# Altium PCB MGNGSQ4_Loopback.PcbDoc
Units mil, origin at the board's own origin, x right, y up, seen from the top; angles counter-clockwise.
Board outline 2280.03 x 2747.03 mil, 4 copper layers (Top Layer, Internal Plane 1, Internal Plane 2, Bottom Layer), stack 30.634 mil thick; 22 components, 71 nets, 146 pads, 0 vias.
Unrouted connection lines stored in the file: 2.
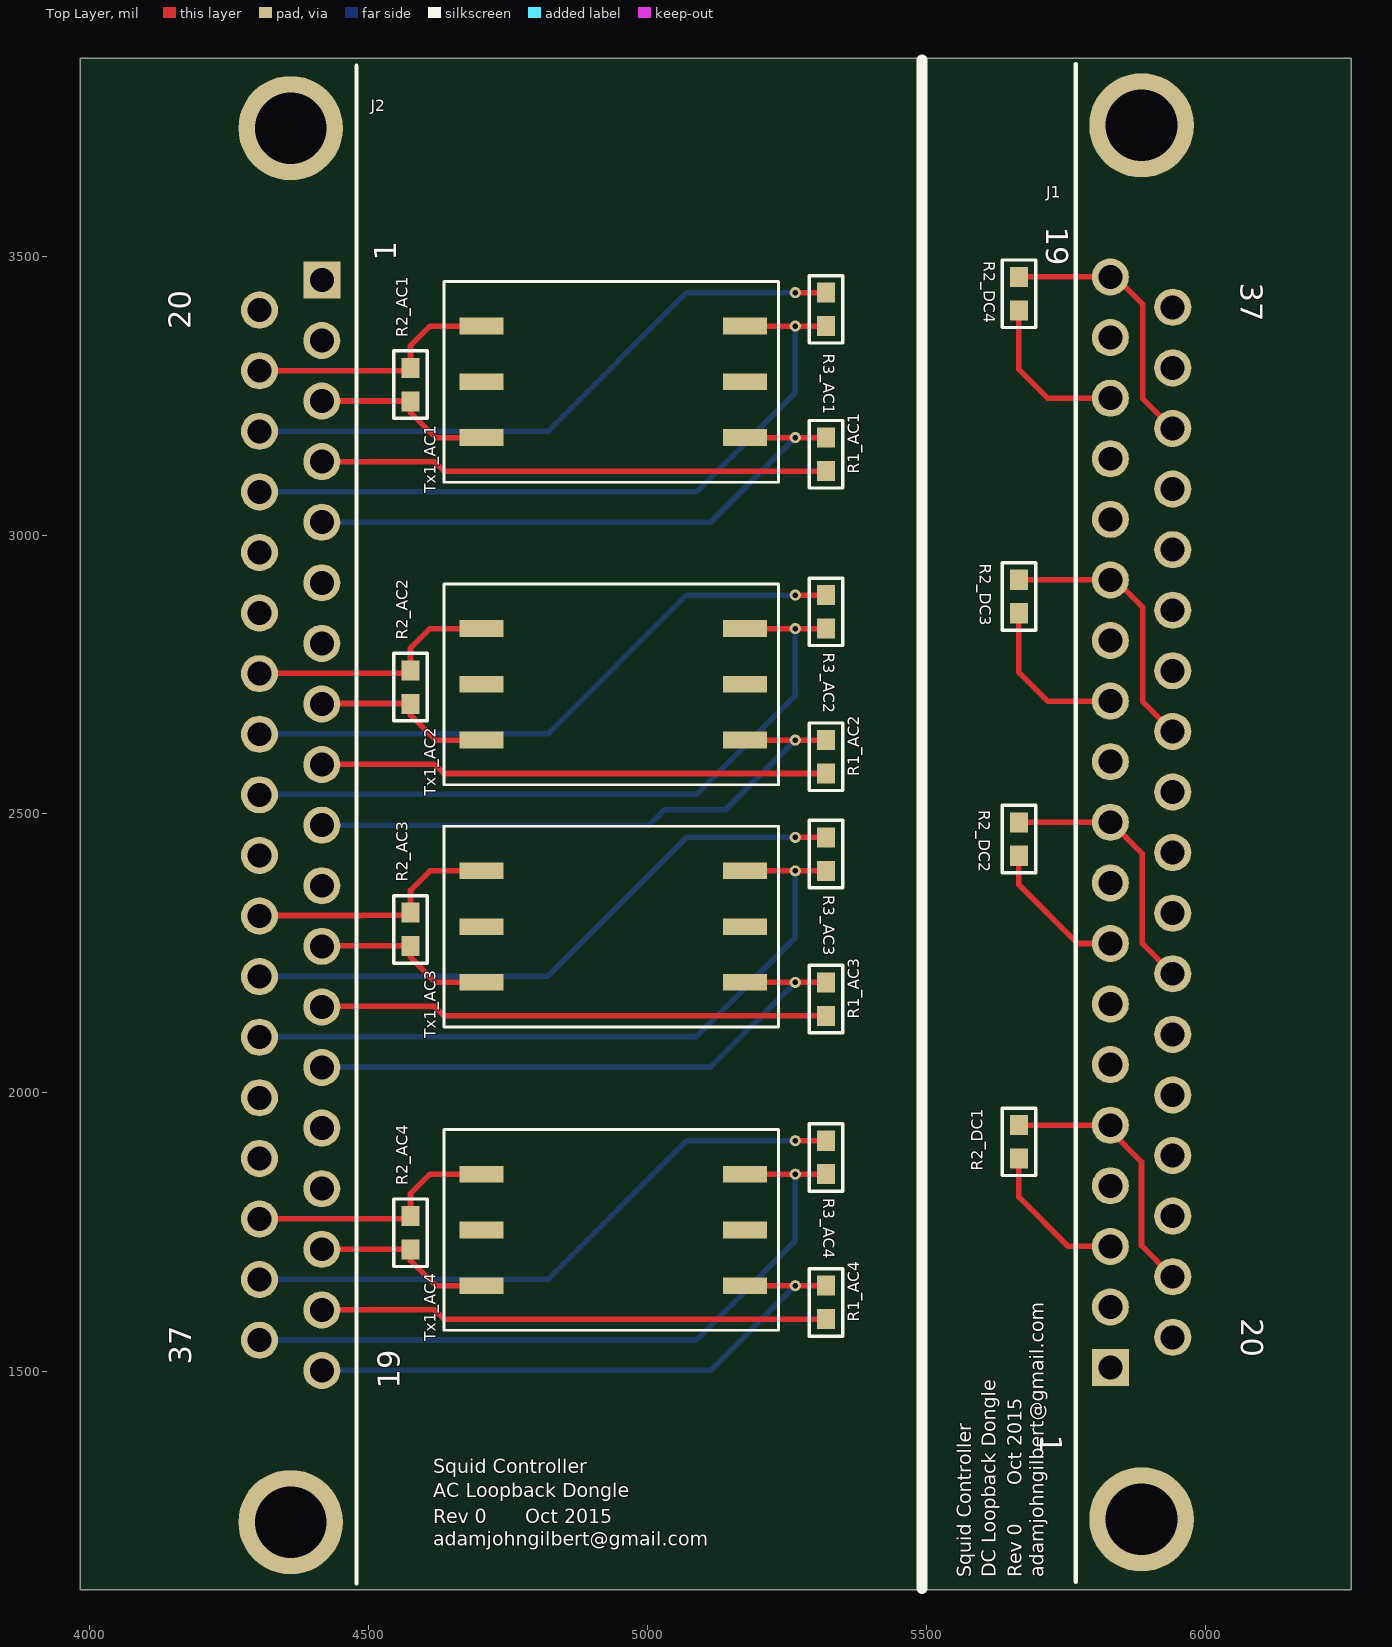
[diagram p0: Top Layer view]
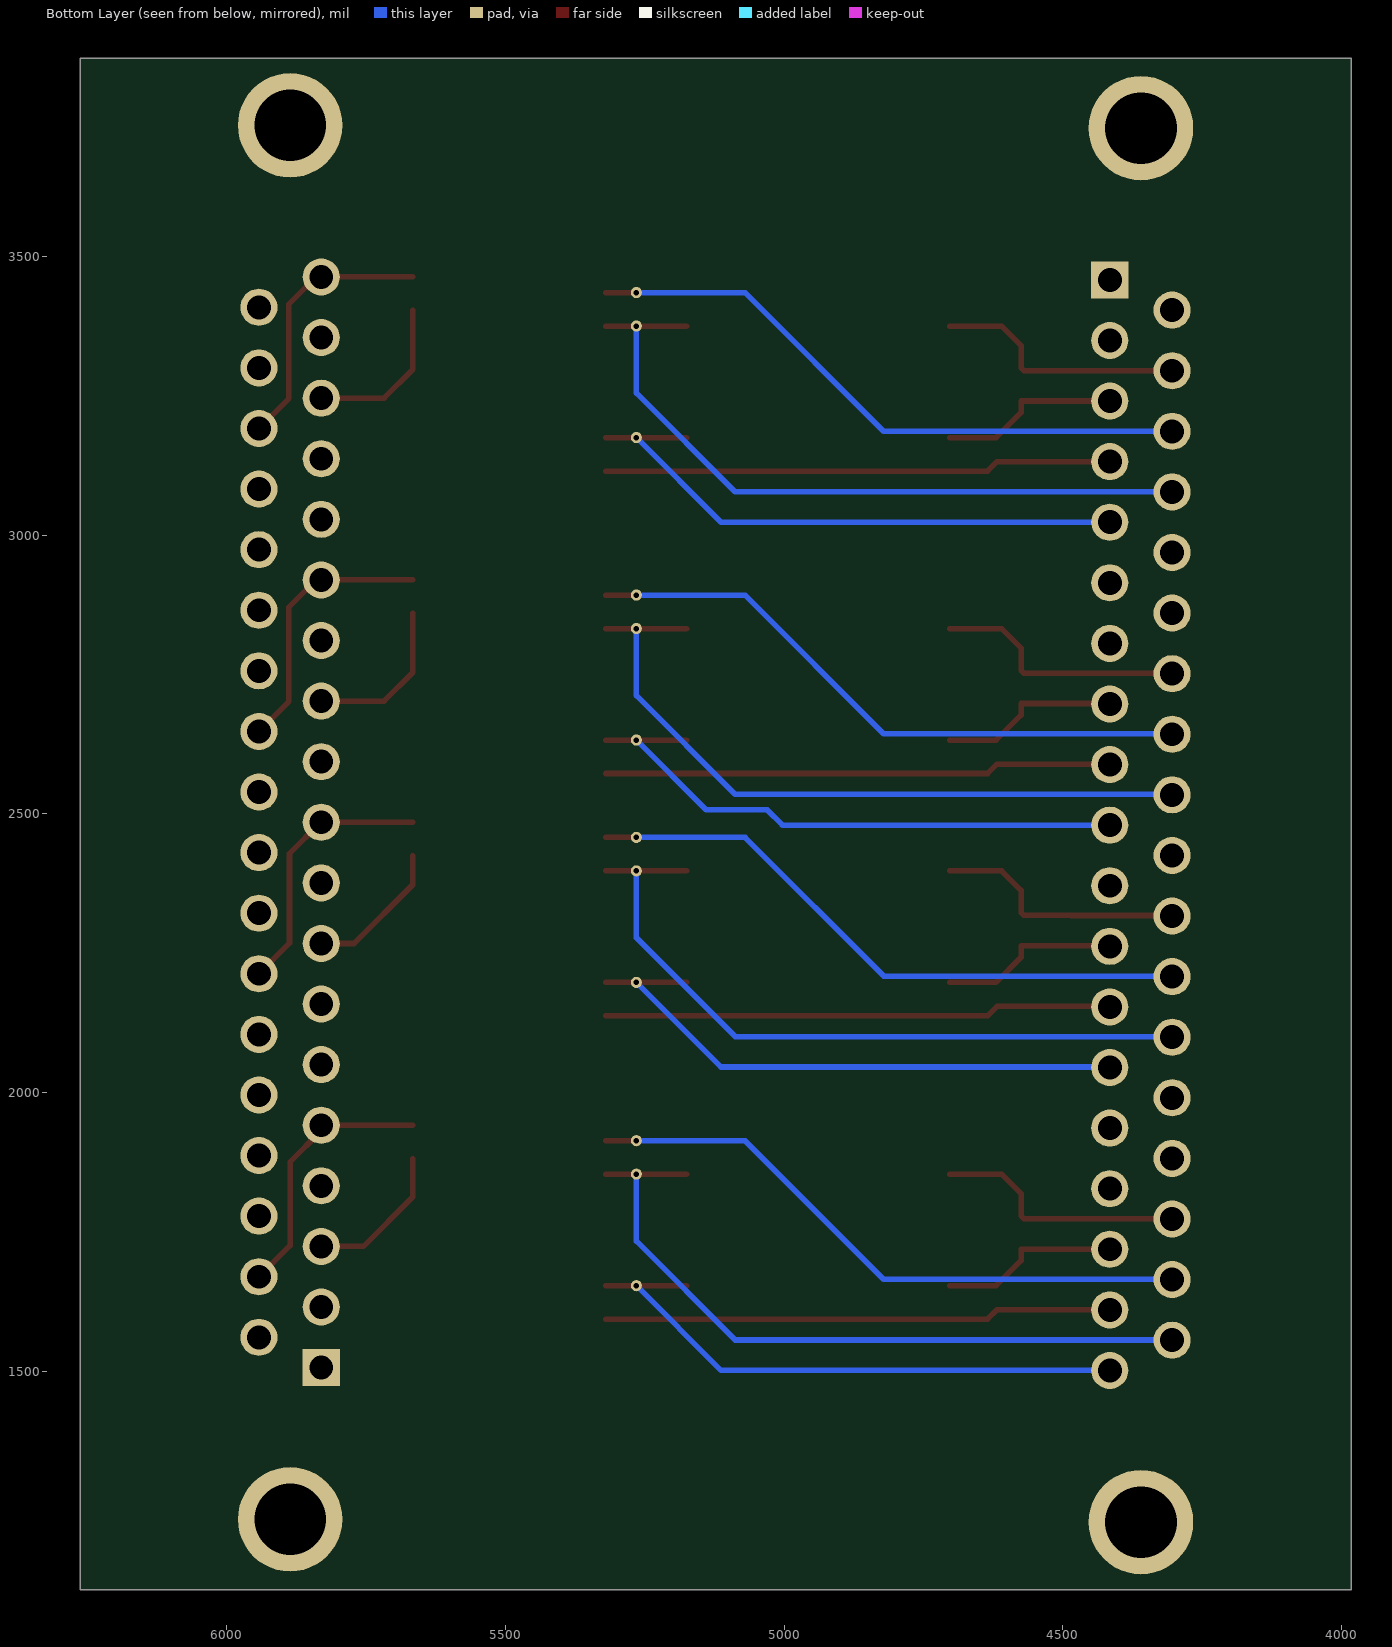
[diagram p1: Bottom Layer view, seen from below]
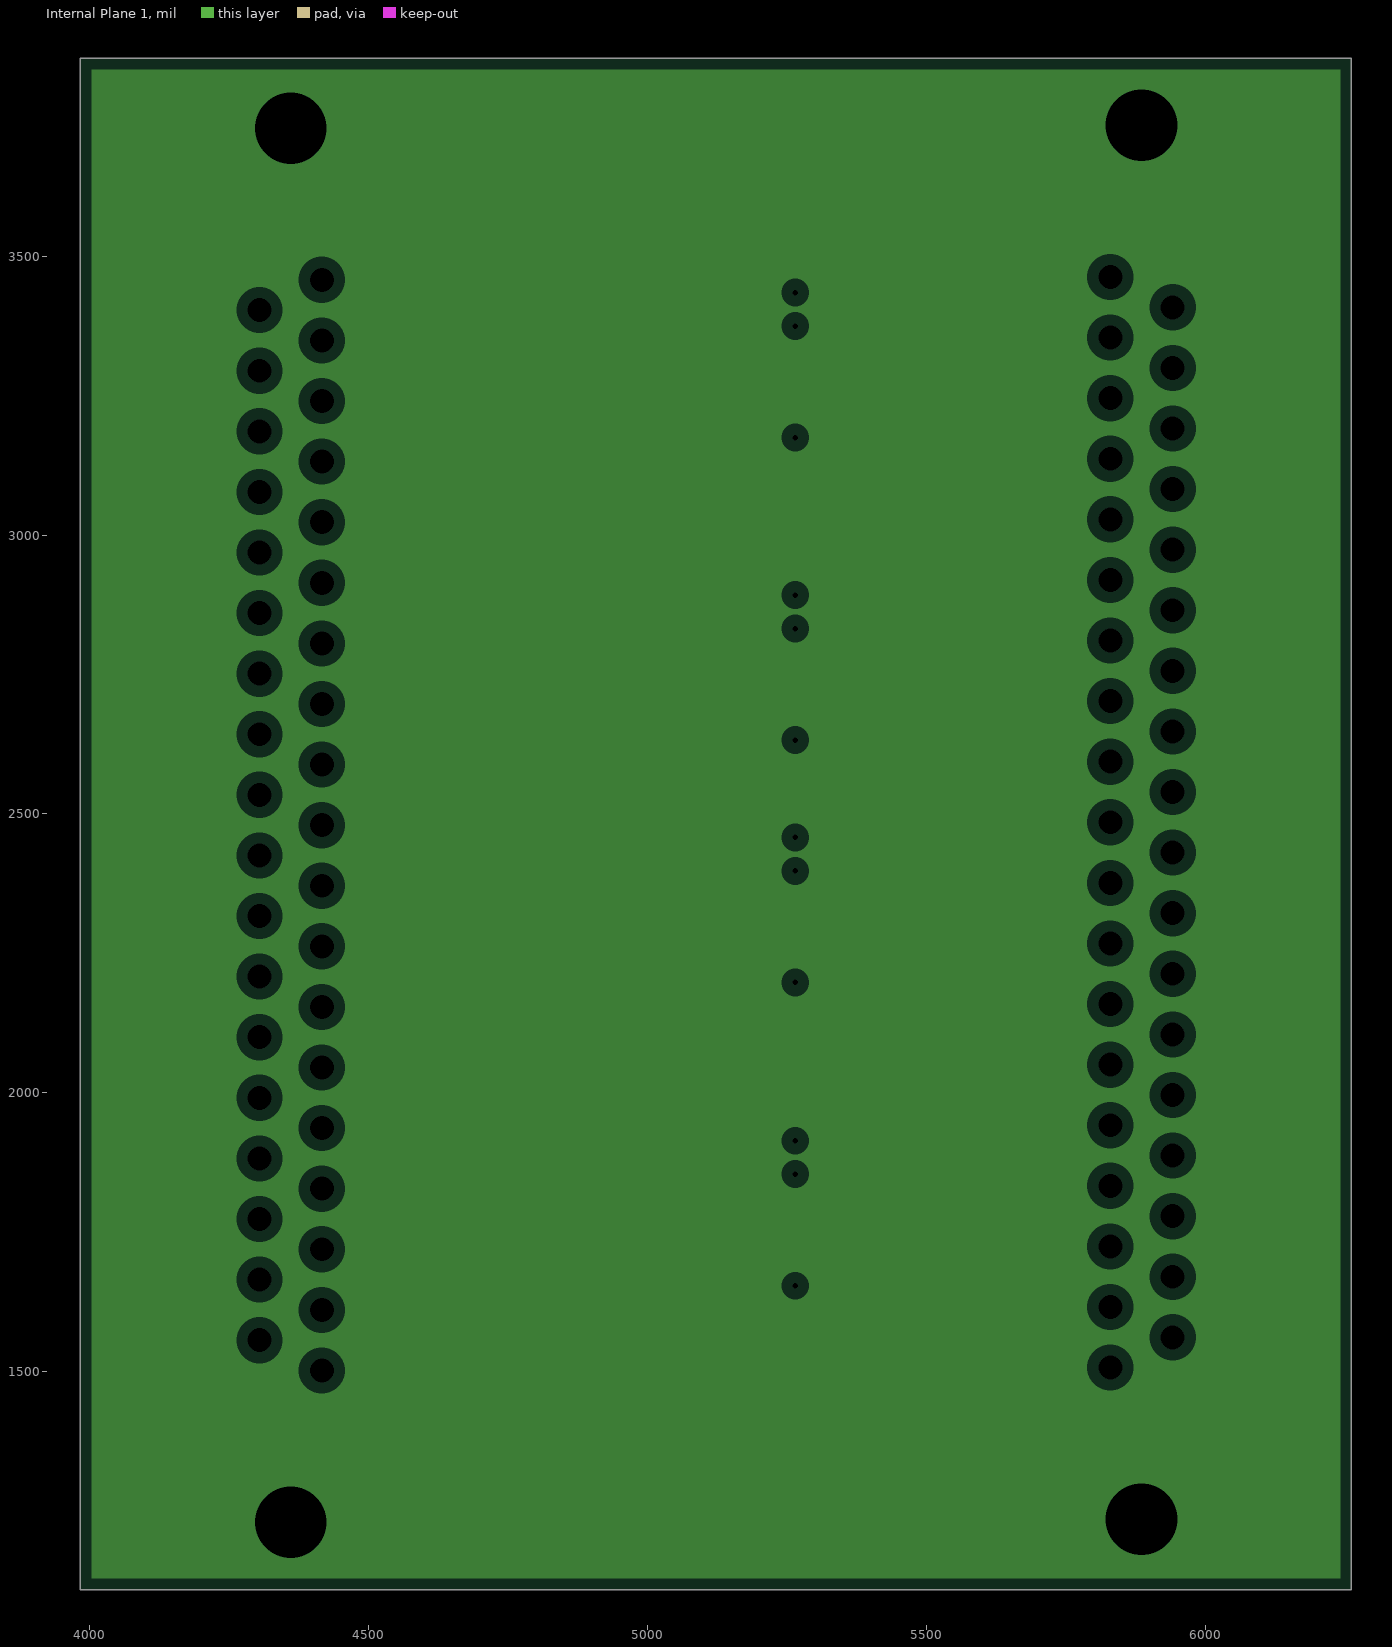
[diagram p2: Internal Plane 1, clearances drawn from the general rule]
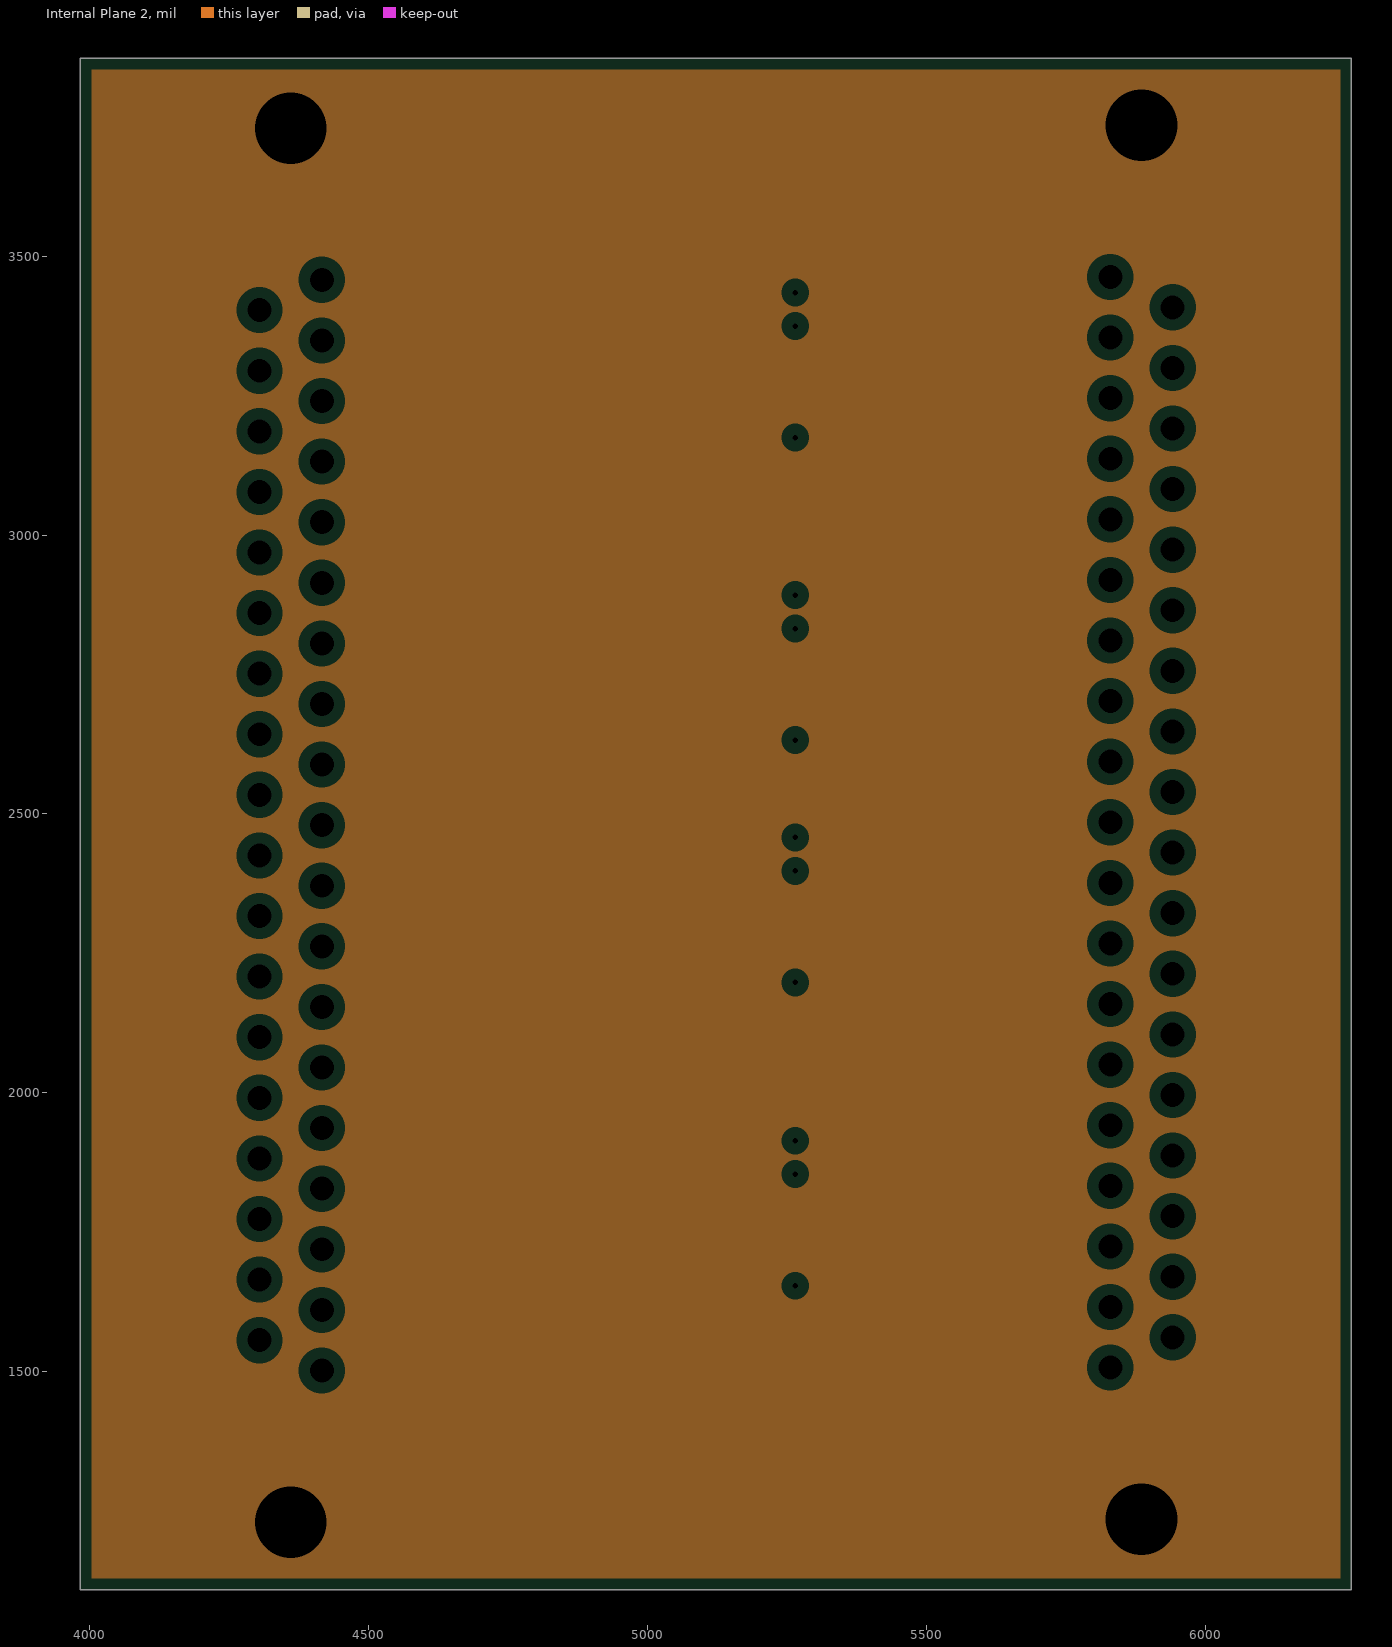
[diagram p3: Internal Plane 2, clearances drawn from the general rule]

## Layer stack, top to bottom
Top Solder: solder mask 0.4, Solder Resist, Dk 3.5
Top Layer: signal copper 1.4
Dielectric 1: core 10, FR-4, Dk 4.2
Internal Plane 1: plane copper 1.417, net GND
Dielectric 3: prepreg 5, Dk 4.2
Internal Plane 2: plane copper 1.417, net GND
Dielectric 2: core 10, Dk 4.2
Bottom Layer: signal copper 1.4
Bottom Solder: solder mask 0.4, Solder Resist, Dk 3.5

## Board outline
3982.49,1111 ccw(c3985,1111) 3985,1108.48 6260,1108.48 ccw(c6260,1111) 6262.52,1111 6262.52,3853 ccw(c6260,3853) 6260,3855.51 3985,3855.51 ccw(c3985,3853) 3982.49,3853

## Design rules (kind name [scope] priority, off if disabled: settings)
Clearance [All] p1: gap=10
PlaneClearance [All] p1: clearance=20
PlaneConnect [All] p1: planeconnectstyle=Relief reliefexpansion=20 reliefentries=4 reliefconductorwidth=10 reliefairgap=10
PolygonConnect [All] p1: connectstyle=Relief reliefconductorwidth=10 reliefentries=4 polygonreliefangle="90 Angle" airgapwidth=10
RoomDefinition AC4 [InComponentClass('AC4')] p1: confinementstyle=ConfineIn formatcopy=TRUE lockcomponents=FALSE outline 0,0 2000,0 2000,1000 0,1000
RoomDefinition AC3 [InComponentClass('AC3')] p2: confinementstyle=ConfineIn formatcopy=TRUE lockcomponents=FALSE outline 0,0 2000,0 2000,1000 0,1000
RoomDefinition AC2 [InComponentClass('AC2')] p3: confinementstyle=ConfineIn formatcopy=TRUE lockcomponents=FALSE outline 0,0 2000,0 2000,1000 0,1000
RoomDefinition AC1 [InComponentClass('AC1')] p4: confinementstyle=ConfineIn formatcopy=TRUE lockcomponents=FALSE outline 0,0 2000,0 2000,1000 0,1000
RoomDefinition DC2 [InComponentClass('DC2')] p5: confinementstyle=ConfineIn formatcopy=TRUE lockcomponents=FALSE outline 4215,1474 5415,1474 5415,1959 4215,1959
RoomDefinition DC3 [InComponentClass('DC3')] p6: confinementstyle=ConfineIn formatcopy=TRUE lockcomponents=FALSE outline 4215,2018 5415,2018 5415,2503 4215,2503
RoutingVias [All] p1: holewidth=28 width=50 viastyle="Through Hole" minholewidth=28 minwidth=50 maxholewidth=28 maxwidth=50
SolderMaskExpansion [All] p1: expansion=4
Width [All] p1: maxlimit=10 minlimit=10 preferedwidth=10
28 further rules are at their usual default settings.

## Classes and differential pairs
channel class Resistor: DC1 DC2 DC3 DC4
component class DC4: R2_DC4
component class DC3: R2_DC3
component class DC2: R2_DC2
component class DC1: R2_DC1
channel class Transformer: C1 C2 C3 C4
component class MGNGSQ4_Loopback: J1 J2
component class AC4: R1_AC4 R2_AC4 R2_C4 R3_AC4 Tx1_AC4
component class AC3: R1_AC3 R2_AC3 R2_C3 R3_AC3 Tx1_AC3
component class AC2: R1_AC2 R1_C2 R2_AC2 R3_AC2 Tx1_AC2
component class AC1: R1_AC1 R1_C1 R2_AC1 R3_AC1 Tx1_AC1

## Components (designator, comment, footprint, x,y, rotation, side; value= is the part's Value field where it differs from the comment)
J1 "DB37M" DSUB37-M 5886,1235 r270 top
J2 "DB37M" DSUB37-M 4360,3730 r90 top
R1_AC1 "10k" 0603 5320,3115 r90 top (schematic designator R1)
R1_AC2 "10k" 0603 5320,2572.5 r90 top (schematic designator R1)
R1_AC3 "10k" 0603 5320,2138 r90 top (schematic designator R1)
R1_AC4 "10k" 0603 5320,1594 r90 top (schematic designator R1)
R2_AC1 "10k" 0603 4575,3240 r90 top (schematic designator R2)
R2_AC2 "10k" 0603 4575,2697.5 r90 top (schematic designator R2)
R2_AC3 "10k" 0603 4575,2263 r90 top (schematic designator R2)
R2_AC4 "10k" 0603 4575,1719 r90 top (schematic designator R2)
R2_DC1 "10k" 0603 5666,1882 r90 top (schematic designator R2)
R2_DC2 "10k" 0603 5666,2425 r90 top (schematic designator R2)
R2_DC3 "10k" 0603 5666,2860 r90 top (schematic designator R2)
R2_DC4 "10k" 0603 5666,3403 r90 top (schematic designator R2)
R3_AC1 "10k" 0603 5320,3435 r270 top (schematic designator R3)
R3_AC2 "10k" 0603 5320,2892.5 r270 top (schematic designator R3)
R3_AC3 "10k" 0603 5320,2458 r270 top (schematic designator R3)
R3_AC4 "10k" 0603 5320,1914 r270 top (schematic designator R3)
Tx1_AC1 "WB2010" WB2010 5175,3175 r180 top (schematic designator Tx1)
Tx1_AC2 "WB2010" WB2010 5175,2632.5 r180 top (schematic designator Tx1)
Tx1_AC3 "WB2010" WB2010 5175,2198 r180 top (schematic designator Tx1)
Tx1_AC4 "WB2010" WB2010 5175,1654 r180 top (schematic designator Tx1)

## Footprints (in the part's own frame and the unit in brackets; to place one, negate y for a bottom-side part, rotate by r counter-clockwise, add the part's x,y. Pads: shape width x height; smd on the part's side, far side on the other; paste and mask are expansions set on the pad)
0603 [mil]
  rect 36x32 smd: 1(0,0) 2(60,0)
  silkscreen extent -31,-30 90,30, body extent -15,-15 75,15, height 39
DSUB37-M [mm] "DSUB 37Pin Male"
  rect 1.69x1.69 hole 1.09: 1(-6.912,-1.42)
  round 1.69 hole 1.09: 2(-9.672,-1.42) 3(-12.432,-1.42) 4(-15.192,-1.42) 5(-17.952,-1.42) 6(-20.712,-1.42) 7(-23.472,-1.42) 8(-26.232,-1.42) 9(-28.992,-1.42) 10(-31.752,-1.42) 11(-34.512,-1.42) 12(-37.272,-1.42) 13(-40.032,-1.42) 14(-42.792,-1.42) 15(-45.552,-1.42) 16(-48.312,-1.42) 17(-51.072,-1.42) 18(-53.832,-1.42) 19(-56.592,-1.42) 20(-8.291,1.42) 21(-11.051,1.42) 22(-13.811,1.42) 23(-16.571,1.42) 24(-19.331,1.42) 25(-22.091,1.42) 26(-24.851,1.42) 27(-27.611,1.42) 28(-30.371,1.42) 29(-33.131,1.42) 30(-35.891,1.42) 31(-38.651,1.42) 32(-41.411,1.42) 33(-44.171,1.42) 34(-46.931,1.42) 35(-49.691,1.42) 36(-52.451,1.42) 37(-55.211,1.42)
  round 4.76 hole 3.26: 38(0,0) 39(-63.5,0)
  silkscreen extent -66.29,-3 2.84,-3
WB2010 [mm] "Transformer 1:1"
  rect 2x0.76 smd: 1(0,0) 2(0,-2.54) 3(0,-5.08) 4(12,-5.08) 5(12,-2.54) 6(12,0)
  silkscreen extent -1.52,-7.11 13.72,2.03

## Part data
R1_AC1 R1_AC2 R1_AC3 R1_AC4 R2_AC1 R2_AC2 R2_AC3 R2_AC4 R2_DC1 R2_DC2 R2_DC3 R2_DC4 R3_AC1 R3_AC2 R3_AC3 R3_AC4: library part "RES 0603", "Resistor"
Tx1_AC1 Tx1_AC2 Tx1_AC3 Tx1_AC4: "WB2010 1:1 Transformer"

## Free pads (board coordinates)
  round 20 hole 10: 0(5265,1654) 0(5265,1854) 0(5265,1914) 0(5265,2198) 0(5265,2398) 0(5265,2458) 0(5265,2632.5) 0(5265,2832.5) 0(5265,2892.5) 0(5265,3175) 0(5265,3375) 0(5265,3435)

## Nets (pads, with @x,y where several pads share a name; then routed paths per layer and width w, separated by ;. In a path a pad name is that pad's centre, name@x,y a point inside that pad or via, vN(x,y) a via of type N, cw(c..) or ccw(c..) an arc to the next point about the centre after c; other vN are vias at no path point)
CHANNEL.BOLO_AC1_N: J2.22 pad.0@5265,3435 R3_AC1.1 | length 1118.9
  Top Layer w10: pad.0@5265,3435 R3_AC1.1
  Bottom Layer w10: J2.22 4821.26,3186.26 5070,3435 pad.0@5265,3435
CHANNEL.BOLO_AC1_P: J2.4 R1_AC1.1 | length 911.1
  Top Layer w10: J2.4 4618.11,3131.89 4635,3115 R1_AC1.1
CHANNEL.BOLO_AC2_N: J2.27 pad.0@5265,2892.5 R3_AC2.1 | length 1118.9
  Top Layer w10: pad.0@5265,2892.5 R3_AC2.1
  Bottom Layer w10: J2.27@4304.1,2643.76 4821.26,2643.76 5070,2892.5 pad.0@5265,2892.5
CHANNEL.BOLO_AC2_P: J2.9 R1_AC2.1 | length 911.1
  Top Layer w10: J2.9@4415.91,2589.39 4618.11,2589.39 4635,2572.5 R1_AC2.1
CHANNEL.BOLO_AC3_N: J2.31 pad.0@5265,2458 R3_AC3.1 | length 1118.9
  Top Layer w10: pad.0@5265,2458 R3_AC3.1
  Bottom Layer w10: J2.31@4304.1,2209.26 4821.26,2209.26 5070,2458 pad.0@5265,2458
CHANNEL.BOLO_AC3_P: J2.13 R1_AC3.1 | length 911.1
  Top Layer w10: J2.13@4415.91,2154.89 4618.11,2154.89 4635,2138 R1_AC3.1
CHANNEL.BOLO_AC4_N: J2.36 pad.0@5265,1914 R3_AC4.1 | length 1118.9
  Top Layer w10: pad.0@5265,1914 R3_AC4.1
  Bottom Layer w10: J2.36@4304.1,1665.26 4821.26,1665.26 5070,1914 pad.0@5265,1914
CHANNEL.BOLO_AC4_P: J2.18 R1_AC4.1 | length 911.1
  Top Layer w10: J2.18@4415.91,1610.89 4618.11,1610.89 4635,1594 R1_AC4.1
CHANNEL.BOLO_DC1_N: J1.22
CHANNEL.BOLO_DC1_P: J1.4
CHANNEL.BOLO_DC2_N: J1.27
CHANNEL.BOLO_DC2_P: J1.9
CHANNEL.BOLO_DC3_N: J1.31
CHANNEL.BOLO_DC3_P: J1.13
CHANNEL.BOLO_DC4_N: J1.36
CHANNEL.BOLO_DC4_P: J1.18
CHANNEL.HEATER_AC1_N: J2.1
CHANNEL.HEATER_AC1_P: J2.24
CHANNEL.HEATER_AC2_P: J2.6
CHANNEL.HEATER_AC3_P: J2.33
CHANNEL.HEATER_AC4_P: J2.15
CHANNEL.HEATER_DC1_N: J1.1
CHANNEL.HEATER_DC1_P: J1.24
CHANNEL.HEATER_DC2_P: J1.6
CHANNEL.HEATER_DC3_P: J1.33
CHANNEL.HEATER_DC4_P: J1.15
CHANNEL.SQUID_BIAS_AC1_N: J2.20
CHANNEL.SQUID_BIAS_AC1_P: J2.2
CHANNEL.SQUID_BIAS_AC2_N: J2.25
CHANNEL.SQUID_BIAS_AC2_P: J2.7
CHANNEL.SQUID_BIAS_AC3_N: J2.29
CHANNEL.SQUID_BIAS_AC3_P: J2.11
CHANNEL.SQUID_BIAS_AC4_N: J2.34
CHANNEL.SQUID_BIAS_AC4_P: J2.16
CHANNEL.SQUID_BIAS_DC1_N: J1.20
CHANNEL.SQUID_BIAS_DC1_P: J1.2
CHANNEL.SQUID_BIAS_DC2_N: J1.25
CHANNEL.SQUID_BIAS_DC2_P: J1.7
CHANNEL.SQUID_BIAS_DC3_N: J1.29
CHANNEL.SQUID_BIAS_DC3_P: J1.11
CHANNEL.SQUID_BIAS_DC4_N: J1.34
CHANNEL.SQUID_BIAS_DC4_P: J1.16
CHANNEL.SQUID_COIL_AC1_N: J2.23 pad.0@5265,3375 R3_AC1.2 Tx1_AC1.3 | length 1299.4
  Top Layer w10: Tx1_AC1.3 5265,3375 R3_AC1.2
  Bottom Layer w10: J2.23 5087.6,3077.6 5265,3255 pad.0@5265,3375
CHANNEL.SQUID_COIL_AC1_P: J2.5 pad.0@5265,3175 R1_AC1.2 Tx1_AC1.1 | length 1057
  Top Layer w10: Tx1_AC1.1 5265,3175 R1_AC1.2
  Bottom Layer w10: J2.5 5113.23,3023.23 pad.0@5265,3175
CHANNEL.SQUID_COIL_AC2_N: J2.28 pad.0@5265,2832.5 R3_AC2.2 Tx1_AC2.3 | length 1299.4
  Top Layer w10: Tx1_AC2.3 5265,2832.5 R3_AC2.2
  Bottom Layer w10: J2.28@4304.1,2535.1 5087.6,2535.1 5265,2712.5 pad.0@5265,2832.5
CHANNEL.SQUID_COIL_AC2_P: J2.10 pad.0@5265,2632.5 R1_AC2.2 Tx1_AC2.1 | length 1057.3
  Top Layer w10: Tx1_AC2.1 5265,2632.5 R1_AC2.2
  Bottom Layer w10: J2.10 5002.92,2479.92 5030.5,2507.5 5140,2507.5 pad.0@5265,2632.5
CHANNEL.SQUID_COIL_AC3_N: J2.32 pad.0@5265,2398 R3_AC3.2 Tx1_AC3.3 | length 1299.4
  Top Layer w10: Tx1_AC3.3 5265,2398 R3_AC3.2
  Bottom Layer w10: J2.32@4304.1,2100.6 5087.6,2100.6 5265,2278 pad.0@5265,2398
CHANNEL.SQUID_COIL_AC3_P: J2.14 pad.0@5265,2198 R1_AC3.2 Tx1_AC3.1 | length 1057
  Top Layer w10: Tx1_AC3.1 5265,2198 R1_AC3.2
  Bottom Layer w10: J2.14@4415.91,2046.23 5113.23,2046.23 pad.0@5265,2198
CHANNEL.SQUID_COIL_AC4_N: J2.37 pad.0@5265,1854 R3_AC4.2 Tx1_AC4.3 | length 1299.4
  Top Layer w10: Tx1_AC4.3 5265,1854 R3_AC4.2
  Bottom Layer w10: J2.37@4304.1,1556.6 5087.6,1556.6 5265,1734 pad.0@5265,1854
CHANNEL.SQUID_COIL_AC4_P: J2.19 pad.0@5265,1654 R1_AC4.2 Tx1_AC4.1 | length 1057
  Top Layer w10: Tx1_AC4.1 5265,1654 R1_AC4.2
  Bottom Layer w10: J2.19@4415.91,1502.23 5113.23,1502.23 pad.0@5265,1654
CHANNEL.SQUID_COIL_DC1_N: J1.23
CHANNEL.SQUID_COIL_DC1_P: J1.5 J1.21 R2_DC1.2 | length 482.2
  Top Layer w10: R2_DC1.2 5829.86,1942 J1.5 5830.09,1931.91 5886,1876 5886,1725.98 J1.21
CHANNEL.SQUID_COIL_DC2_N: J1.28
CHANNEL.SQUID_COIL_DC2_P: J1.10 J1.26 R2_DC2.2 | length 482.6
  Top Layer w10: R2_DC2.2 5830.02,2485 J1.10 5830.92,2485.08 5887,2429 5887,2268.29 J1.26
CHANNEL.SQUID_COIL_DC3_N: J1.32
CHANNEL.SQUID_COIL_DC3_P: J1.14 J1.30 R2_DC3.2 | length 487.6
  Top Layer w10: R2_DC3.2 5829.82,2920 J1.14 5839.28,2919.72 5888,2871 5888,2701.94 J1.30
CHANNEL.SQUID_COIL_DC4_N: J1.37
CHANNEL.SQUID_COIL_DC4_P: J1.19 J1.35 R2_DC4.2 | length 478
  Top Layer w10: R2_DC4.2@5666,3463.31 J1.19@5829.82,3463.31 ; J1.19@5839.28,3463.03 5888,3414.31 5888,3245.24 J1.35
CHANNEL.SQUID_SENSE_AC1_N: J2.3 R2_AC1.1 Tx1_AC1.6 | length 325.5
  Top Layer w10: J2.3 4574.45,3240.55 R2_AC1.1 4575,3220 4620,3175 Tx1_AC1.6
CHANNEL.SQUID_SENSE_AC1_P: J2.21 R2_AC1.2 Tx1_AC1.4 | length 455.1
  Top Layer w10: J2.21 4484.92,3294.92 4485,3295 4570,3295 R2_AC1.2 4575,3340 4610,3375 Tx1_AC1.4
CHANNEL.SQUID_SENSE_AC2_N: J2.8 R2_AC2.1 Tx1_AC2.6 | length 325.5
  Top Layer w10: J2.8@4415.91,2698.05 4574.45,2698.05 R2_AC2.1 4575,2677.5 4620,2632.5 Tx1_AC2.6
CHANNEL.SQUID_SENSE_AC2_P: J2.26 R2_AC2.2 Tx1_AC2.4 | length 455.1
  Top Layer w10: J2.26@4304.1,2752.42 4484.92,2752.42 4485,2752.5 4570,2752.5 R2_AC2.2 4575,2797.5 4610,2832.5 Tx1_AC2.4
CHANNEL.SQUID_SENSE_AC3_N: J2.12 R2_AC3.1 Tx1_AC3.6 | length 325.5
  Top Layer w10: J2.12@4415.91,2263.55 4574.45,2263.55 R2_AC3.1 4575,2243 4620,2198 Tx1_AC3.6
CHANNEL.SQUID_SENSE_AC3_P: J2.30 R2_AC3.2 Tx1_AC3.4 | length 455.1
  Top Layer w10: J2.30@4304.1,2317.92 4484.92,2317.92 4485,2318 4570,2318 R2_AC3.2 4575,2363 4610,2398 Tx1_AC3.4
CHANNEL.SQUID_SENSE_AC4_N: J2.17 R2_AC4.1 Tx1_AC4.6 | length 325.5
  Top Layer w10: J2.17@4415.91,1719.55 4574.45,1719.55 R2_AC4.1 4575,1699 4620,1654 Tx1_AC4.6
CHANNEL.SQUID_SENSE_AC4_P: J2.35 R2_AC4.2 Tx1_AC4.4 | length 455.1
  Top Layer w10: J2.35@4304.1,1773.92 4484.92,1773.92 4485,1774 4570,1774 R2_AC4.2 4575,1819 4610,1854 Tx1_AC4.4
CHANNEL.SQUID_SENSE_DC1_N: J1.3 R2_DC1.1 | length 269.8
  Top Layer w10: R2_DC1.1 5666,1813 5754.55,1724.45 J1.3
CHANNEL.SQUID_SENSE_DC2_N: J1.8 R2_DC2.1 | length 259.7
  Top Layer w10: R2_DC2.1 5666,2373 5771.25,2267.75 J1.8
CHANNEL.SQUID_SENSE_DC3_N: J1.12 R2_DC3.1 | length 291.5
  Top Layer w10: R2_DC3.1 5666,2754 5717.6,2702.4 J1.12
CHANNEL.SQUID_SENSE_DC4_N: J1.17 R2_DC4.1 | length 291.5
  Top Layer w10: R2_DC4.1@5666,3403.31 5666,3297.31 5717.6,3245.71 J1.17
GND: J1.38 J1.39 J2.38 J2.39
pads on no net: Tx1_AC1.2 Tx1_AC1.5 Tx1_AC2.2 Tx1_AC2.5 Tx1_AC3.2 Tx1_AC3.5 Tx1_AC4.2 Tx1_AC4.5

## Polygon pours and split planes (outlines as drawn)
GND on Internal Plane 1 (split plane): 6242.42,1128.58 4002.58,1128.58 4002.58,3835.42 6242.42,3835.42
GND on Internal Plane 2 (split plane): 6242.42,1128.58 4002.58,1128.58 4002.58,3835.42 6242.42,3835.42

## Silkscreen, mask and mechanical layers (free items; w line width, h text height)
Top Overlay:
  lines w20: 5492,1111 5492,3852
  text "Squid Controller" at 4616,1318 h25
  text "Oct 2015" at 5671,1296 h25 r90
  text "AC Loopback Dongle" at 4616,1274.67 h25
  text "Rev 0" at 4616,1228 h25
  text "Oct 2015" at 4781,1228 h25
  text "adamjohngilbert@gmail.com" at 4616,1188 h25
  text "Squid Controller" at 5581,1131 h25 r90
  text "DC Loopback Dongle" at 5624.33,1131 h25 r90
  text "Rev 0" at 5671,1131 h25 r90
  text "adamjohngilbert@gmail.com" at 5711,1131 h25 r90
Mechanical 1:
  lines w5: 5445,3852 5444,3853 ; 5444,3853 6260,3853 6260,1111 5445,1111 3985,1111 3985,3853 5444,3853

## Text inside footprints (layer, text, board x,y; h text height)
J1: Top Overlay "20" at 6065.02,1595.75 h40 r270; Top Overlay "19" at 5715,3553 h40 r270; Top Overlay "1" at 5704,1387 h40 r270; Top Overlay "37" at 6064.15,3452.89 h40 r270
J2: Top Overlay "20" at 4180.98,3369.25 h40 r90; Top Overlay "19" at 4555.98,1469.25 h40 r90; Top Overlay "1" at 4549,3492 h40 r90; Top Overlay "37" at 4181.85,1512.11 h40 r90